# EAGLE board Qwiic_LoRa-Panel (EAGLE 7.7.0)
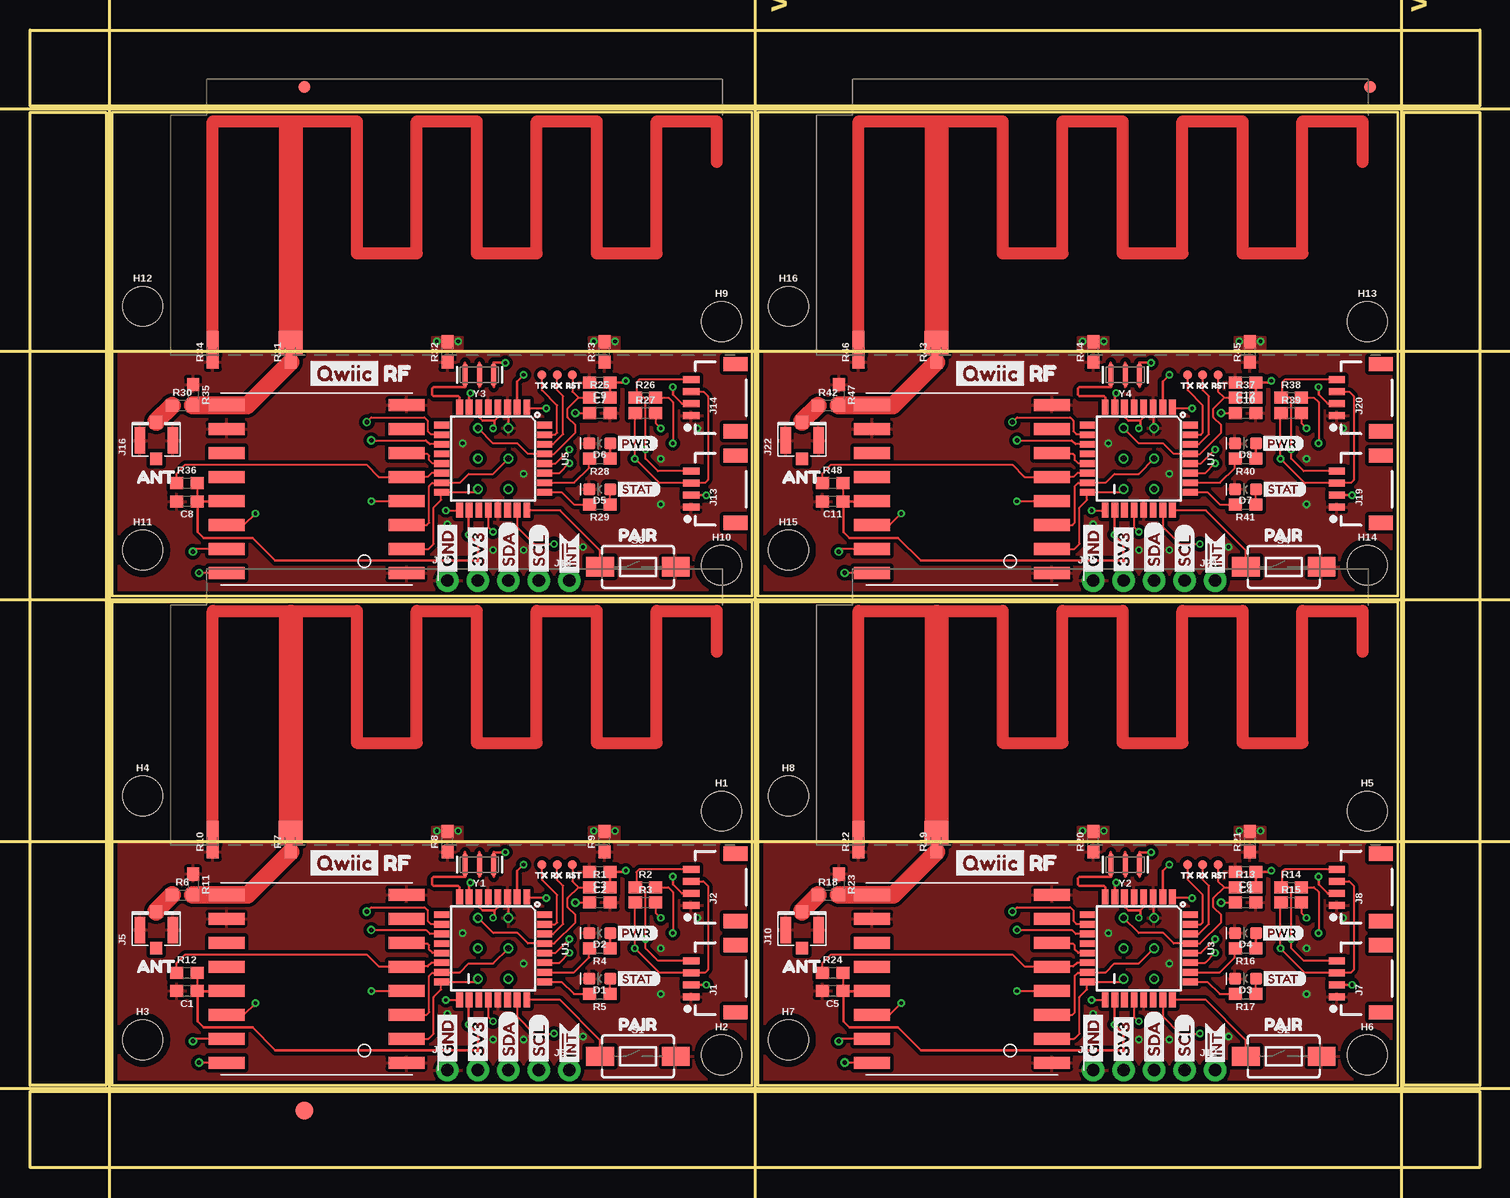
[diagram p0: board, top side]
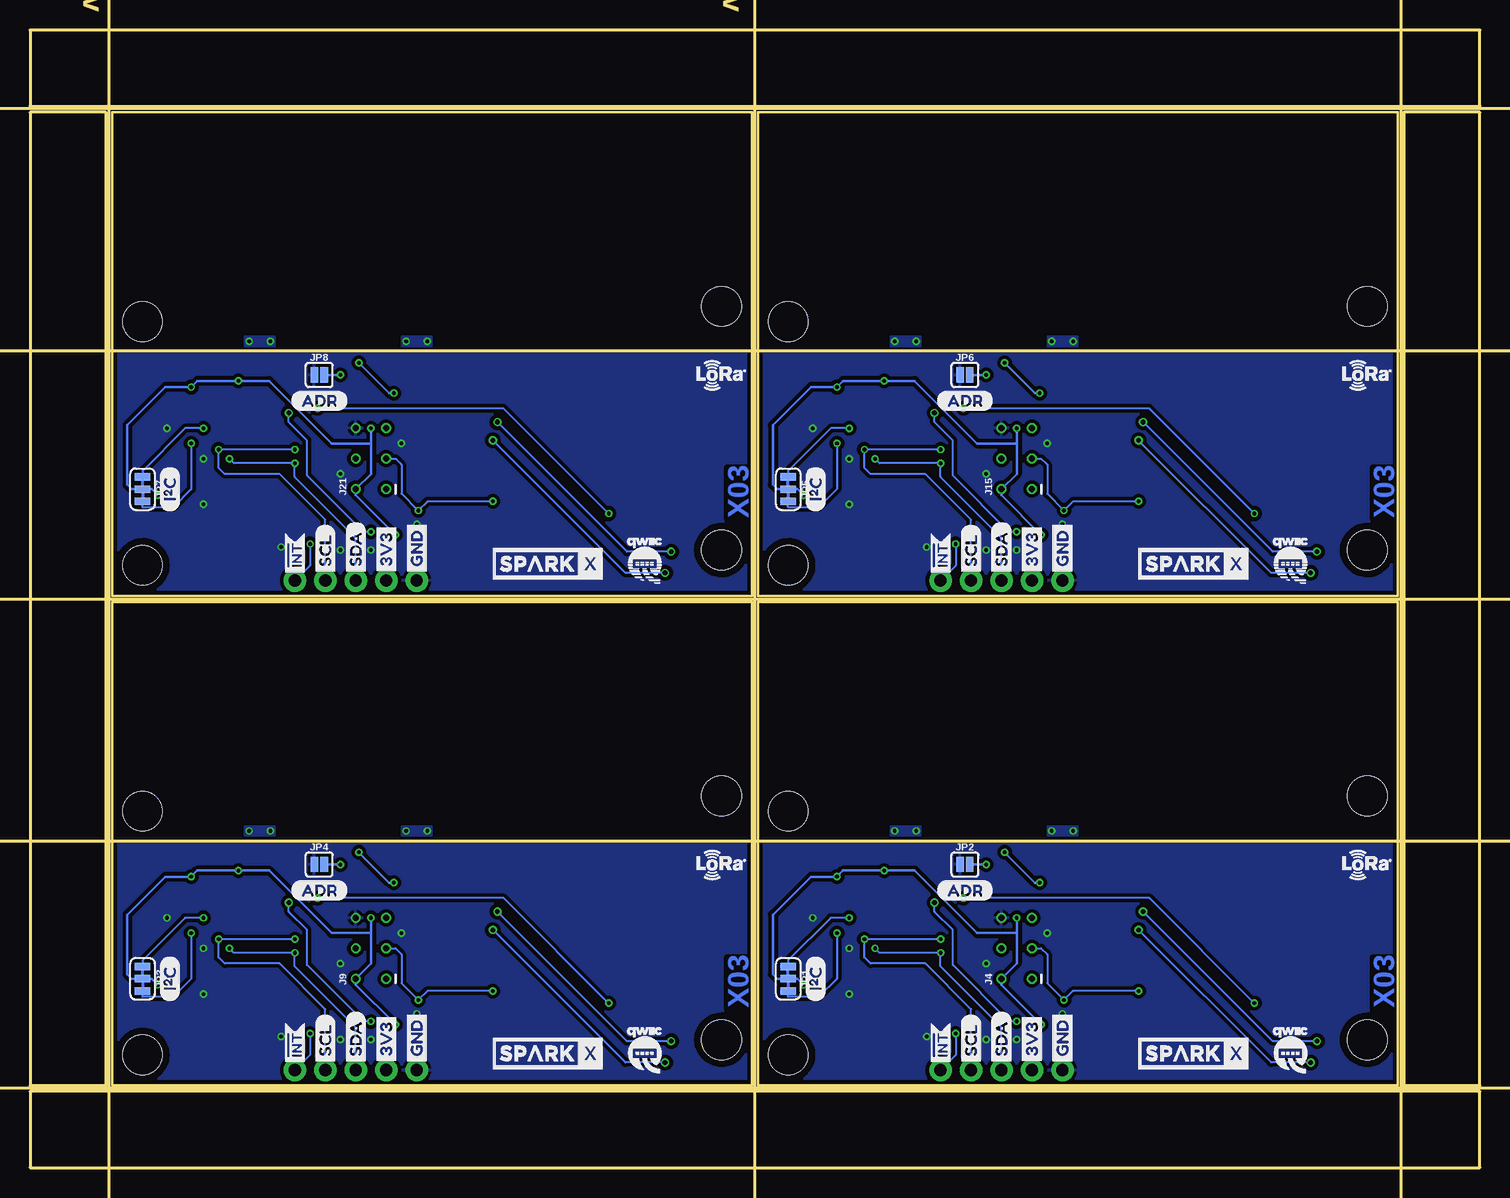
[diagram p1: board, bottom side, seen from below]

Size 120.86 x 94.84 mm. Coordinates in mm from the lower left corner, seen from the top.
Outline: 6.86,6.86 60.18,6.86 60.18,47.17 6.86,47.17 6.86,6.86
Outline: 60.69,6.86 114.01,6.86 114.01,47.17 60.69,47.17 60.69,6.86
Outline: 6.86,47.68 60.18,47.68 60.18,87.99 6.86,87.99 6.86,47.68
Outline: 60.69,47.68 114.01,47.68 114.01,87.99 60.69,87.99 60.69,47.68
Outline: 0,6.35 120.86,6.35 120.86,0 0,0 0,6.35
Outline: 114.51,87.99 120.86,87.99 120.86,6.86 114.51,6.86 114.51,87.99
Outline: 0,94.84 120.86,94.84 120.86,88.49 0,88.49 0,94.84
Outline: 0,87.99 6.35,87.99 6.35,6.86 0,6.86 0,87.99
Copper layers (1*16): Top 0.035mm / dielectric 1.5mm / Bottom 0.035mm
Design rules "SparkFun-2-layer-PCBWay-LIMIT": minimum track width 6mil, minimum drill 0.3mm, track to track 6mil, track to pad 6mil, pad to pad 6mil, via to via 6mil, smd to smd 6mil, copper to edge 6mil, drill to drill 6mil, minimum pad ring 6mil, minimum via ring 6mil, stop-mask expansion 4mil, vias tented up to drill 25mil, thermal gap 10mil
Net classes: 0 default: width 0.152 mm, drill 0.305 mm; 1 3v3: width 0.203 mm, drill 0.305 mm
Milling: 8 lines

## Footprints (pad centres in the part's own frame; a part is rotated, then mirrored left to right if it is on the bottom)
0603 = smd 1.1 x 1: 1 -0.85,0; 2 0.85,0
LED-0603 = smd 1 x 1: A -0.877,0; C 0.877,0
FIDUCIAL-1X2 = smd 1 x 1: 1 0,0
FIDUCIAL-1.5X3 = smd 1.5 x 1.5: 1 0,0
STAND-OFF = hole 3.302: 0,0
1X04_1MM_RA = smd 0.6 x 1.35: 1 -1.5,0; 2 -0.5,0; 3 0.5,0; 4 1.5,0 | smd 1.2 x 2: NC1 2.8,-3.675; NC2 -2.8,-3.675
1X04_NO_SILK = drill 1.016 pad 1.88: 1 0,0; 2 2.54,0; 3 5.08,0; 4 7.62,0
2X3_TEST_POINTS = drill 0.508: 1 -2.54,-1.27; 2 -2.54,1.27; 3 0,-1.27; 4 0,1.27; 5 2.54,-1.27; 6 2.54,1.27
U.FL = smd 2.2 x 0.85: 1 0,1.375; 2 0,-1.375 | smd 1.05 x 1: FEED 1.525,0; NC -1.525,0
1X01_NO_SILK = drill 1.016 pad 1.88: 1 0,0
SMT-JUMPER_3_2-NC_TRACE_SILK = smd 0.635 x 1.27: 1 -1.016,0; 2 0,0; 3 1.016,0
SMT-JUMPER_2_NO_SILK = smd 0.635 x 1.27: 1 -0.406,0; 2 0.406,0
TACTILE_SWITCH_SMD_6.0X3.5MM = smd 2.3 x 1.6: 1 -3.15,0; 2 3.15,0
PAD.03X.03 = smd 0.762 x 0.762: P$1 0,0
TQFP32-08 = smd 1.27 x 0.559: 1 -4.293,2.8; 2 -4.293,2; 3 -4.293,1.2; 4 -4.293,0.4; 5 -4.293,-0.4; 6 -4.293,-1.2; 7 -4.293,-2; 8 -4.293,-2.8; 17 4.293,-2.8; 18 4.293,-2; 19 4.293,-1.2; 20 4.293,-0.4; 21 4.293,0.4; 22 4.293,1.2; 23 4.293,2; 24 4.293,2.8 | smd 0.559 x 1.27: 9 -2.8,-4.293; 10 -2,-4.293; 11 -1.2,-4.293; 12 -0.4,-4.293; 13 0.4,-4.293; 14 1.2,-4.293; 15 2,-4.293; 16 2.8,-4.293; 25 2.8,4.293; 26 2,4.293; 27 1.2,4.293; 28 0.4,4.293; 29 -0.4,4.293; 30 -1.2,4.293; 31 -2,4.293; 32 -2.8,4.293
RFM95/96/97/98W = smd 3 x 1: 3.3V 7.5,1; !RESET -7.5,-3; ANT 7.5,-7; DIO0 7.5,3; DIO1 7.5,5; DIO2 7.5,7; DIO3 7.5,-3; DIO4 7.5,-1; DIO5 -7.5,-5; GND@1 -7.5,7; GND@2 -7.5,-7; GND@3 7.5,-5; MISO -7.5,5; MOSI -7.5,3; NSS -7.5,-1; SCK -7.5,1
ANTENNA_INVERTED_F_915MHZ = smd 2 x 2: FEED 6,2 | smd 1 x 2: GND -0.5,2
RESONATOR-SMD-3.2X1.3 = smd 0.45 x 1.905: 1 -1.2,0; 2 0,0; 3 1.2,0

## Placement (x,y rotation side)
C1  4.7uF  [0603]  13.08,14.73 180 top
C2  0.1uF  [0603]  47.5,22.1 0 top
C3  0.1uF  [0603]  47.5,24.64 180 top
C4  0.1uF  [0603]  101.33,22.1 0 top
C5  4.7uF  [0603]  66.91,14.73 180 top
C6  0.1uF  [0603]  101.33,24.64 180 top
C7  0.1uF  [0603]  47.5,62.92 0 top
C8  4.7uF  [0603]  13.08,55.55 180 top
C9  0.1uF  [0603]  47.5,65.46 180 top
C10  0.1uF  [0603]  101.33,62.92 0 top
C11  4.7uF  [0603]  66.91,55.55 180 top
C12  0.1uF  [0603]  101.33,65.46 180 top
D1  BLUE  [LED-0603]  47.5,15.75 180 top
D2  RED  [LED-0603]  47.5,19.56 180 top
D3  BLUE  [LED-0603]  101.33,15.75 180 top
D4  RED  [LED-0603]  101.33,19.56 180 top
D5  BLUE  [LED-0603]  47.5,56.57 180 top
D6  RED  [LED-0603]  47.5,60.38 180 top
D7  BLUE  [LED-0603]  101.33,56.57 180 top
D8  RED  [LED-0603]  101.33,60.38 180 top
E$1  [FIDUCIAL-1X2]  22.86,90.08 0 top
E$2  [FIDUCIAL-1X2]  111.72,90.08 0 top
E$3  [FIDUCIAL-1.5X3]  22.86,4.76 0 top
H1  STAND-OFF  [STAND-OFF]  57.66,29.72 0 top
H2  STAND-OFF  [STAND-OFF]  57.66,9.4 0 top
H3  STAND-OFF  [STAND-OFF]  9.4,10.67 0 top
H4  STAND-OFF  [STAND-OFF]  9.4,30.99 0 top
H5  STAND-OFF  [STAND-OFF]  111.49,29.72 0 top
H6  STAND-OFF  [STAND-OFF]  111.49,9.4 0 top
H7  STAND-OFF  [STAND-OFF]  63.23,10.67 0 top
H8  STAND-OFF  [STAND-OFF]  63.23,30.99 0 top
H9  STAND-OFF  [STAND-OFF]  57.66,70.54 0 top
H10  STAND-OFF  [STAND-OFF]  57.66,50.22 0 top
H11  STAND-OFF  [STAND-OFF]  9.4,51.49 0 top
H12  STAND-OFF  [STAND-OFF]  9.4,71.81 0 top
H13  STAND-OFF  [STAND-OFF]  111.49,70.54 0 top
H14  STAND-OFF  [STAND-OFF]  111.49,50.22 0 top
H15  STAND-OFF  [STAND-OFF]  63.23,51.49 0 top
H16  STAND-OFF  [STAND-OFF]  63.23,71.81 0 top
J1  Qwiic Right Angle  [1X04_1MM_RA]  55.12,15.75 90 top
J2  Qwiic Right Angle  [1X04_1MM_RA]  55.12,23.37 90 top
J3  [1X04_NO_SILK]  34.8,8.13 0 top
J4  AVR_SPI_PROG  [2X3_TEST_POINTS]  38.61,18.29 90 bottom
J5  U.FL  [U.FL]  10.54,19.81 90 top
J6  [1X01_NO_SILK]  44.96,8.13 0 top
J7  Qwiic Right Angle  [1X04_1MM_RA]  108.95,15.75 90 top
J8  Qwiic Right Angle  [1X04_1MM_RA]  108.95,23.37 90 top
J9  AVR_SPI_PROG  [2X3_TEST_POINTS]  92.44,18.29 90 bottom
J10  U.FL  [U.FL]  64.37,19.81 90 top
J11  [1X04_NO_SILK]  88.63,8.13 0 top
J12  [1X01_NO_SILK]  98.79,8.13 0 top
J13  Qwiic Right Angle  [1X04_1MM_RA]  55.12,56.57 90 top
J14  Qwiic Right Angle  [1X04_1MM_RA]  55.12,64.19 90 top
J15  AVR_SPI_PROG  [2X3_TEST_POINTS]  38.61,59.11 90 bottom
J16  U.FL  [U.FL]  10.54,60.63 90 top
J17  [1X04_NO_SILK]  34.8,48.95 0 top
J18  [1X01_NO_SILK]  44.96,48.95 0 top
J19  Qwiic Right Angle  [1X04_1MM_RA]  108.95,56.57 90 top
J20  Qwiic Right Angle  [1X04_1MM_RA]  108.95,64.19 90 top
J21  AVR_SPI_PROG  [2X3_TEST_POINTS]  92.44,59.11 90 bottom
J22  U.FL  [U.FL]  64.37,60.63 90 top
J23  [1X04_NO_SILK]  88.63,48.95 0 top
J24  [1X01_NO_SILK]  98.79,48.95 0 top
JP1  [SMT-JUMPER_3_2-NC_TRACE_SILK]  57.66,15.75 270 bottom
JP2  JUMPER-SMT_2_NO_SILK  [SMT-JUMPER_2_NO_SILK]  42.93,25.27 0 bottom
JP3  [SMT-JUMPER_3_2-NC_TRACE_SILK]  111.49,15.75 270 bottom
JP4  JUMPER-SMT_2_NO_SILK  [SMT-JUMPER_2_NO_SILK]  96.75,25.27 0 bottom
JP5  [SMT-JUMPER_3_2-NC_TRACE_SILK]  57.66,56.57 270 bottom
JP6  JUMPER-SMT_2_NO_SILK  [SMT-JUMPER_2_NO_SILK]  42.93,66.09 0 bottom
JP7  [SMT-JUMPER_3_2-NC_TRACE_SILK]  111.49,56.57 270 bottom
JP8  JUMPER-SMT_2_NO_SILK  [SMT-JUMPER_2_NO_SILK]  96.75,66.09 0 bottom
R1  10k  [0603]  47.5,23.37 0 top
R2  2.2k  [0603]  51.31,23.37 0 top
R3  2.2k  [0603]  51.31,22.1 0 top
R4  1k  [0603]  47.5,18.29 180 top
R5  1k  [0603]  47.5,14.48 180 top
R6  DNP  [0603]  12.7,22.73 0 top
R7  0  [0603]  21.72,27.18 90 top
R8  0  [0603]  34.8,27.18 90 top
R9  0  [0603]  47.88,27.18 90 top
R10  0  [0603]  15.24,27.18 90 top
R11  DNP  [0603]  13.59,23.62 270 top
R12  10k  [0603]  13.08,16.26 0 top
R13  10k  [0603]  101.33,23.37 0 top
R14  2.2k  [0603]  105.14,23.37 0 top
R15  2.2k  [0603]  105.14,22.1 0 top
R16  1k  [0603]  101.33,18.29 180 top
R17  1k  [0603]  101.33,14.48 180 top
R18  DNP  [0603]  66.53,22.73 0 top
R19  0  [0603]  75.55,27.18 90 top
R20  0  [0603]  88.63,27.18 90 top
R21  0  [0603]  101.71,27.18 90 top
R22  0  [0603]  69.07,27.18 90 top
R23  DNP  [0603]  67.42,23.62 270 top
R24  10k  [0603]  66.91,16.26 0 top
R25  10k  [0603]  47.5,64.19 0 top
R26  2.2k  [0603]  51.31,64.19 0 top
R27  2.2k  [0603]  51.31,62.92 0 top
R28  1k  [0603]  47.5,59.11 180 top
R29  1k  [0603]  47.5,55.3 180 top
R30  DNP  [0603]  12.7,63.55 0 top
R31  0  [0603]  21.72,68 90 top
R32  0  [0603]  34.8,68 90 top
R33  0  [0603]  47.88,68 90 top
R34  0  [0603]  15.24,68 90 top
R35  DNP  [0603]  13.59,64.44 270 top
R36  10k  [0603]  13.08,57.07 0 top
R37  10k  [0603]  101.33,64.19 0 top
R38  2.2k  [0603]  105.14,64.19 0 top
R39  2.2k  [0603]  105.14,62.92 0 top
R40  1k  [0603]  101.33,59.11 180 top
R41  1k  [0603]  101.33,55.3 180 top
R42  DNP  [0603]  66.53,63.55 0 top
R43  0  [0603]  75.55,68 90 top
R44  0  [0603]  88.63,68 90 top
R45  0  [0603]  101.71,68 90 top
R46  0  [0603]  69.07,68 90 top
R47  DNP  [0603]  67.42,64.44 270 top
R48  10k  [0603]  66.91,57.07 0 top
S1  6.0X3.5MM  [TACTILE_SWITCH_SMD_6.0X3.5MM]  50.67,9.27 0 top
S2  6.0X3.5MM  [TACTILE_SWITCH_SMD_6.0X3.5MM]  104.5,9.27 0 top
S3  6.0X3.5MM  [TACTILE_SWITCH_SMD_6.0X3.5MM]  50.67,50.09 0 top
S4  6.0X3.5MM  [TACTILE_SWITCH_SMD_6.0X3.5MM]  104.5,50.09 0 top
TP1  [PAD.03X.03]  43.94,25.27 0 top
TP2  [PAD.03X.03]  42.67,25.27 0 top
TP3  [PAD.03X.03]  45.21,25.27 0 top
TP4  [PAD.03X.03]  97.77,25.27 0 top
TP5  [PAD.03X.03]  96.5,25.27 0 top
TP6  [PAD.03X.03]  99.04,25.27 0 top
TP7  [PAD.03X.03]  43.94,66.09 0 top
TP8  [PAD.03X.03]  42.67,66.09 0 top
TP9  [PAD.03X.03]  45.21,66.09 0 top
TP10  [PAD.03X.03]  97.77,66.09 0 top
TP11  [PAD.03X.03]  96.5,66.09 0 top
TP12  [PAD.03X.03]  99.04,66.09 0 top
U1  ATMEGA328P_TQFP  [TQFP32-08]  38.61,18.29 270 top
U2  RFM96W  [RFM95/96/97/98W]  23.88,15.75 180 top
U3  ATMEGA328P_TQFP  [TQFP32-08]  92.44,18.29 270 top
U4  RFM96W  [RFM95/96/97/98W]  77.7,15.75 180 top
U5  ATMEGA328P_TQFP  [TQFP32-08]  38.61,59.11 270 top
U6  RFM96W  [RFM95/96/97/98W]  23.88,56.57 180 top
U7  ATMEGA328P_TQFP  [TQFP32-08]  92.44,59.11 270 top
U8  RFM96W  [RFM95/96/97/98W]  77.7,56.57 180 top
U$1  ANTENNA_915MHZ_INVERTED_F  [ANTENNA_INVERTED_F_915MHZ]  15.75,25.91 0 top
U$2  [ANT0]  8,16.76 0 top
U$3  [PAIR1]  48.13,11.94 0 top
U$4  [SDA-[)]  39.88,8.38 90 top
U$5  [SCL-[)]  42.42,8.38 90 top
U$6  [GND-04]  34.8,8.38 90 top
U$7  [3V3-04]  37.34,8.38 90 top
U$8  [PWR1]  48.64,19.56 0 top
U$9  [STAT2]  48.64,15.75 0 top
U$10  [QWIIC-LOGO-SMALL]  15.88,9.78 0 bottom
U$11  [TX1]  41.66,24.38 0 top
U$12  [INT#-[<]  44.96,8.13 90 top
U$13  [SPARKX-MEDIUM]  23.88,9.53 0 bottom
U$14  [ADR-()]  45.34,23.11 0 bottom
U$15  [RF1]  28.32,25.4 0 top
U$16  [QWIIC0]  22.73,25.4 0 top
U$17  [LORA_MARK#PNG]  9.53,25.27 0 bottom
U$18  [GND-04]  34.8,8.38 90 top
U$19  [GND-04]  34.8,8.38 90 bottom
U$20  [3V3-04]  37.34,8.38 90 top
U$21  [3V3-04]  37.34,8.38 90 bottom
U$22  [SDA-[)]  39.88,8.38 90 bottom
U$23  [SCL-[)]  42.42,8.38 90 bottom
U$24  [INT#-[<]  44.96,8.13 90 bottom
U$25  [I_SUPER2_C-()-04]  55.37,13.84 90 bottom
U$26  ANTENNA_915MHZ_INVERTED_F  [ANTENNA_INVERTED_F_915MHZ]  69.58,25.91 0 top
U$27  [RX0]  42.93,24.38 0 top
U$28  [RST2]  44.2,24.38 0 top
U$29  [SDA-[)]  93.71,8.38 90 top
U$30  [SCL-[)]  96.25,8.38 90 top
U$31  [GND-04]  88.63,8.38 90 top
U$32  [3V3-04]  91.17,8.38 90 top
U$33  [PWR1]  102.47,19.56 0 top
U$34  [STAT2]  102.47,15.75 0 top
U$35  [QWIIC0]  76.56,25.4 0 top
U$36  [SPARKX-MEDIUM]  77.7,9.53 0 bottom
U$37  [INT#-[<]  98.79,8.13 90 top
U$38  [GND-04]  88.63,8.38 90 top
U$39  [GND-04]  88.63,8.38 90 bottom
U$40  [3V3-04]  91.17,8.38 90 top
U$41  [3V3-04]  91.17,8.38 90 bottom
U$42  [SDA-[)]  93.71,8.38 90 bottom
U$43  [SCL-[)]  96.25,8.38 90 bottom
U$44  [INT#-[<]  98.79,8.13 90 bottom
U$45  [ADR-()]  99.17,23.11 0 bottom
U$46  [I_SUPER2_C-()-04]  109.2,13.84 90 bottom
U$47  [RF1]  82.15,25.4 0 top
U$48  [QWIIC-LOGO-SMALL]  69.7,9.78 0 bottom
U$49  [LORA_MARK#PNG]  63.35,25.27 0 bottom
U$50  [ANT0]  61.83,16.76 0 top
U$51  [PAIR1]  101.96,11.94 0 top
U$52  [TX1]  95.48,24.38 0 top
U$53  [RX0]  96.75,24.38 0 top
U$54  [RST2]  98.02,24.38 0 top
U$55  ANTENNA_915MHZ_INVERTED_F  [ANTENNA_INVERTED_F_915MHZ]  15.75,66.73 0 top
U$56  [SDA-[)]  39.88,49.2 90 top
U$57  [SCL-[)]  42.42,49.2 90 top
U$58  [GND-04]  34.8,49.2 90 top
U$59  [3V3-04]  37.34,49.2 90 top
U$60  [PWR1]  48.64,60.38 0 top
U$61  [STAT2]  48.64,56.57 0 top
U$62  [QWIIC0]  22.73,66.22 0 top
U$63  [SPARKX-MEDIUM]  23.88,50.34 0 bottom
U$64  [INT#-[<]  44.96,48.95 90 top
U$65  [GND-04]  34.8,49.2 90 top
U$66  [GND-04]  34.8,49.2 90 bottom
U$67  [3V3-04]  37.34,49.2 90 top
U$68  [3V3-04]  37.34,49.2 90 bottom
U$69  [SDA-[)]  39.88,49.2 90 bottom
U$70  [SCL-[)]  42.42,49.2 90 bottom
U$71  [INT#-[<]  44.96,48.95 90 bottom
U$72  [ADR-()]  45.34,63.93 0 bottom
U$73  [I_SUPER2_C-()-04]  55.37,54.66 90 bottom
U$74  [RF1]  28.32,66.22 0 top
U$75  [QWIIC-LOGO-SMALL]  15.88,50.6 0 bottom
U$76  [LORA_MARK#PNG]  9.53,66.09 0 bottom
U$77  [ANT0]  8,57.58 0 top
U$78  [PAIR1]  48.13,52.76 0 top
U$79  [TX1]  41.66,65.2 0 top
U$80  [RX0]  42.93,65.2 0 top
U$81  [RST2]  44.2,65.2 0 top
U$82  ANTENNA_915MHZ_INVERTED_F  [ANTENNA_INVERTED_F_915MHZ]  69.58,66.73 0 top
U$83  [SDA-[)]  93.71,49.2 90 top
U$84  [SCL-[)]  96.25,49.2 90 top
U$85  [GND-04]  88.63,49.2 90 top
U$86  [3V3-04]  91.17,49.2 90 top
U$87  [PWR1]  102.47,60.38 0 top
U$88  [STAT2]  102.47,56.57 0 top
U$89  [QWIIC0]  76.56,66.22 0 top
U$90  [SPARKX-MEDIUM]  77.7,50.34 0 bottom
U$91  [INT#-[<]  98.79,48.95 90 top
U$92  [GND-04]  88.63,49.2 90 top
U$93  [GND-04]  88.63,49.2 90 bottom
U$94  [3V3-04]  91.17,49.2 90 top
U$95  [3V3-04]  91.17,49.2 90 bottom
U$96  [SDA-[)]  93.71,49.2 90 bottom
U$97  [SCL-[)]  96.25,49.2 90 bottom
U$98  [INT#-[<]  98.79,48.95 90 bottom
U$99  [ADR-()]  99.17,63.93 0 bottom
U$100  [I_SUPER2_C-()-04]  109.2,54.66 90 bottom
U$101  [RF1]  82.15,66.22 0 top
U$102  [QWIIC-LOGO-SMALL]  69.7,50.6 0 bottom
U$103  [LORA_MARK#PNG]  63.35,66.09 0 bottom
U$104  [ANT0]  61.83,57.58 0 top
U$105  [PAIR1]  101.96,52.76 0 top
U$106  [TX1]  95.48,65.2 0 top
U$107  [RX0]  96.75,65.2 0 top
U$108  [RST2]  98.02,65.2 0 top
Y1  16MHz  [RESONATOR-SMD-3.2X1.3]  37.47,25.27 180 top
Y2  16MHz  [RESONATOR-SMD-3.2X1.3]  91.29,25.27 180 top
Y3  16MHz  [RESONATOR-SMD-3.2X1.3]  37.47,66.09 180 top
Y4  16MHz  [RESONATOR-SMD-3.2X1.3]  91.29,66.09 180 top

## Library data of the parts
C1 C5 C8 C11 = SparkFun-Capacitors; PROD_ID: CAP-08280
C2-C4 C6 C7 C9 C10 C12 = SparkFun-Capacitors; PROD_ID: CAP-00810
D1 D3 D5 D7 = SparkFun-LED; PROD_ID: DIO-08575
D2 D4 D6 D8 = SparkFun-LED; PROD_ID: DIO-00819
E$1 E$2 = SparkFun-Aesthetics
E$3 = SparkFun-Retired
H1-H16 = SparkFun-Hardware
J1 J2 J7 J8 J13 J14 J19 J20 = SparkFun-Connectors; PROD_ID: CONN-13694
J3 J11 J17 J23 = SparkFun-Connectors; PROD_ID: CONN-09696
J4 J6 J9 J12 J15 J18 J21 J24 TP1-TP12 = SparkFun-Connectors
J5 J10 J16 J22 = SparkFun-Connectors; PROD_ID: CONN-09193; SF_ID: WRL-09144
JP1-JP8 = SparkFun-Jumpers
R1 R12 R13 R24 R25 R36 R37 R48 = SparkFun-Resistors; PROD_ID: RES-00824
R2 R3 R14 R15 R26 R27 R38 R39 = SparkFun-Resistors; PROD_ID: RES-08272
R4 R5 R16 R17 R28 R29 R40 R41 = SparkFun-Resistors; PROD_ID: RES-07856
R6-R11 R18-R23 R30-R35 R42-R47 = SparkFun-Resistors
S1-S4 = SparkFun-Switches; PROD_ID: SWCH-00815; SF_SKU: COM-08229
U1 U3 U5 U7 = SparkFun-IC-Microcontroller; PROD_ID: IC-09069
U2 U4 U6 U8 U$1 U$13 U$26 U$36 U$55 U$63 U$82 U$90 = SparkX
U$2 U$3 U$50 U$51 U$77 U$78 U$104 U$105 = buzzard_labels (30)
U$4-U$7 U$10 U$12 U$14 U$18-U$25 U$29-U$32 U$37-U$46 U$48 U$56-U$59 U$64-U$73 U$75 U$83-U$86 U$91-U$100 U$102 = Labels
U$8 U$9 U$33 U$34 U$60 U$61 U$87 U$88 = buzzard_labels
U$11 U$27 U$28 U$52-U$54 U$79-U$81 U$106-U$108 = buzzard_labels (32)
U$15 U$47 U$74 U$101 = buzzard_labels (29)
U$16 U$35 U$62 U$89 = buzzard_labels (1)
U$17 U$49 U$76 U$103 = lora_mark#PNG (3)
Y1-Y4 = SparkFun-Clocks; PROD_ID: XTAL-08900

## Nets
3.3V [3v3]: C1.1 C3.1 J1.2 J2.2 J3.2 J4.2 JP1.2 R1.2 R12.2 U1.4 U1.6 U1.18 U2.3.3V
3.3V1 [3v3]: C5.1 C6.1 J7.2 J8.2 J9.2 J11.2 JP3.2 R13.2 R24.2 U3.4 U3.6 U3.18 U4.3.3V
3.3V2 [3v3]: C8.1 C9.1 J13.2 J14.2 J15.2 J17.2 JP5.2 R25.2 R36.2 U5.4 U5.6 U5.18 U6.3.3V
3.3V3 [3v3]: C11.1 C12.1 J19.2 J20.2 J21.2 J23.2 JP7.2 R37.2 R48.2 U7.4 U7.6 U7.18 U8.3.3V
ADDR_SELECT: JP2.2 U1.2
ADDR_SELECT1: JP4.2 U3.2
ADDR_SELECT2: JP6.2 U5.2
ADDR_SELECT3: JP8.2 U7.2
ANCHOR1: R8.2
ANCHOR2: R9.2
ANCHOR3: R20.2
ANCHOR4: R21.2
ANCHOR5: R32.2
ANCHOR6: R33.2
ANCHOR7: R44.2
ANCHOR8: R45.2
ANT: R6.2 R7.1 R11.2 U2.ANT
ANT1: R18.2 R19.1 R23.2 U4.ANT
ANT2: R30.2 R31.1 R35.2 U6.ANT
ANT3: R42.2 R43.1 R47.2 U8.ANT
GND: C1.2 C2.2 C3.2 D1.C D2.C J1.1 J2.1 J3.1 J4.6 J5.1 J5.2 JP2.1 R8.1 R9.1 R10.1 R11.1 S1.2 U1.3 U1.5 U1.21 U2.GND@1 U2.GND@2 U2.GND@3 Y1.2
GND1: C4.2 C5.2 C6.2 D3.C D4.C J7.1 J8.1 J9.6 J10.1 J10.2 J11.1 JP4.1 R20.1 R21.1 R22.1 R23.1 S2.2 U3.3 U3.5 U3.21 U4.GND@1 U4.GND@2 U4.GND@3 Y2.2
GND2: C7.2 C8.2 C9.2 D5.C D6.C J13.1 J14.1 J15.6 J16.1 J16.2 J17.1 JP6.1 R32.1 R33.1 R34.1 R35.1 S3.2 U5.3 U5.5 U5.21 U6.GND@1 U6.GND@2 U6.GND@3 Y3.2
GND3: C10.2 C11.2 C12.2 D7.C D8.C J19.1 J20.1 J21.6 J22.1 J22.2 J23.1 JP8.1 R44.1 R45.1 R46.1 R47.1 S4.2 U7.3 U7.5 U7.21 U8.GND@1 U8.GND@2 U8.GND@3 Y4.2
INT: J6.1 U1.23
INT1: J12.1 U3.23
INT2: J18.1 U5.23
INT3: J24.1 U7.23
MISO: J4.1 U1.16 U2.MISO
MISO1: J9.1 U3.16 U4.MISO
MISO2: J15.1 U5.16 U6.MISO
MISO3: J21.1 U7.16 U8.MISO
MOSI: J4.4 U1.15 U2.MOSI
MOSI1: J9.4 U3.15 U4.MOSI
MOSI2: J15.4 U5.15 U6.MOSI
MOSI3: J21.4 U7.15 U8.MOSI
N$1: D2.A R4.1
N$2: D1.A R5.1
N$3: C2.1 U1.20
N$4: U1.7 Y1.1
N$5: U1.8 Y1.3
N$6: R7.2 U$1.FEED
N$7: JP1.1 R3.2
N$8: JP1.3 R2.2
N$9: J5.FEED R6.1
N$10: U3.7 Y2.1
N$11: R10.2 U$1.GND
N$12: U3.8 Y2.3
N$13: JP3.1 R15.2
N$14: JP3.3 R14.2
N$15: D4.A R16.1
N$16: D3.A R17.1
N$17: J10.FEED R18.1
N$18: C4.1 U3.20
N$19: R19.2 U$26.FEED
N$20: R22.2 U$26.GND
N$21: U5.7 Y3.1
N$22: U5.8 Y3.3
N$23: JP5.1 R27.2
N$24: JP5.3 R26.2
N$25: D6.A R28.1
N$26: D5.A R29.1
N$27: J16.FEED R30.1
N$28: C7.1 U5.20
N$29: R31.2 U$55.FEED
N$30: R34.2 U$55.GND
N$31: U7.7 Y4.1
N$32: U7.8 Y4.3
N$33: JP7.1 R39.2
N$34: JP7.3 R38.2
N$35: D8.A R40.1
N$36: D7.A R41.1
N$37: J22.FEED R42.1
N$38: C10.1 U7.20
N$39: R43.2 U$82.FEED
N$40: R46.2 U$82.GND
PAIR_BTN: S1.1 U1.24
PAIR_BTN1: S2.1 U3.24
PAIR_BTN2: S3.1 U5.24
PAIR_BTN3: S4.1 U7.24
PAIR_LED: R5.2 U1.25
PAIR_LED1: R17.2 U3.25
PAIR_LED2: R29.2 U5.25
PAIR_LED3: R41.2 U7.25
PWR_LED: R4.2 U1.26
PWR_LED1: R16.2 U3.26
PWR_LED2: R28.2 U5.26
PWR_LED3: R40.2 U7.26
RFM_CS: R12.1 U1.14 U2.NSS
RFM_CS1: R24.1 U3.14 U4.NSS
RFM_CS2: R36.1 U5.14 U6.NSS
RFM_CS3: R48.1 U7.14 U8.NSS
RFM_DIO1: U1.10 U2.DIO1
RFM_DIO2: U1.11 U2.DIO2
RFM_DIO3: U3.10 U4.DIO1
RFM_DIO4: U3.11 U4.DIO2
RFM_DIO5: U5.10 U6.DIO1
RFM_DIO6: U5.11 U6.DIO2
RFM_DIO7: U7.10 U8.DIO1
RFM_DIO8: U7.11 U8.DIO2
RFM_INT: U1.1 U2.DIO0
RFM_INT1: U3.1 U4.DIO0
RFM_INT2: U5.1 U6.DIO0
RFM_INT3: U7.1 U8.DIO0
RFM_RST: U1.13 U2.!RESET
RFM_RST1: U3.13 U4.!RESET
RFM_RST2: U5.13 U6.!RESET
RFM_RST3: U7.13 U8.!RESET
RST: J4.5 R1.1 TP3.P$1 U1.29
RST1: J9.5 R13.1 TP6.P$1 U3.29
RST2: J15.5 R25.1 TP9.P$1 U5.29
RST3: J21.5 R37.1 TP12.P$1 U7.29
RX: TP1.P$1 U1.30
RX1: TP4.P$1 U3.30
RX2: TP7.P$1 U5.30
RX3: TP10.P$1 U7.30
SCK: J4.3 U1.17 U2.SCK
SCK1: J9.3 U3.17 U4.SCK
SCK2: J15.3 U5.17 U6.SCK
SCK3: J21.3 U7.17 U8.SCK
SCL: J1.4 J2.4 J3.4 R2.1 U1.28
SCL1: J7.4 J8.4 J11.4 R14.1 U3.28
SCL2: J13.4 J14.4 J17.4 R26.1 U5.28
SCL3: J19.4 J20.4 J23.4 R38.1 U7.28
SDA: J1.3 J2.3 J3.3 R3.1 U1.27
SDA1: J7.3 J8.3 J11.3 R15.1 U3.27
SDA2: J13.3 J14.3 J17.3 R27.1 U5.27
SDA3: J19.3 J20.3 J23.3 R39.1 U7.27
TX: TP2.P$1 U1.31
TX1: TP5.P$1 U3.31
TX2: TP8.P$1 U5.31
TX3: TP11.P$1 U7.31

## Tracks (layer width: path | path; a pad name or v marks a point on that pad's centre or on a via)
3.3V  (via drill 0.3)
  Top 0.152: R12.2 C1.1
  Top 0.203: J3.2 37.34,9.78 | 37.34,9.78 37.34,11.18 v36.58,11.94 36.58,13.96 U1.18 | 37.34,9.78 20.45,9.78 18.54,11.68 14.48,11.68 13.97,12.19 13.97,14.69 | J1.2 v56.38,15.25 v56.39,15.24 | J2.2 54.35,22.87 53.59,23.62 v53.59,24.26 | U1.4 39.01,21.74 38.73,21.46 | 38.73,21.46 37.72,21.46 37.47,21.72 37.47,22.52 U1.6 | 38.73,21.46 38.73,20.95 v38.61,20.83 | 48.39,23.41 R1.2 C3.1 49.53,24.64 v49.66,24.76 | 13.97,14.69 C1.1 | 13.97,14.69 16.32,14.69 U2.3.3V
  Bottom 0.203: v56.39,15.24 56.9,15.75 JP1.2 58.55,15.75 58.93,16.13 58.93,21.08 55.75,24.26 v53.59,24.26 53.09,24.76 v49.66,24.76 47.12,24.76 41.91,19.56 38.61,19.56 | v36.58,11.94 39.88,15.24 J4.2 38.61,17.02 38.61,19.56 | v38.61,20.83 38.61,19.56
3.3V1  (via drill 0.3)
  Top 0.152: R24.2 C5.1
  Top 0.203: J11.2 91.17,9.78 | 91.17,9.78 91.17,11.18 v90.4,11.94 90.4,13.96 U3.18 | 91.17,9.78 74.28,9.78 72.37,11.68 68.31,11.68 67.8,12.19 67.8,14.69 | J7.2 110.21,15.25 v110.22,15.24 | J8.2 108.18,22.87 107.42,23.62 v107.42,24.26 | U3.4 92.84,21.74 92.56,21.46 | 92.56,21.46 91.55,21.46 91.29,21.72 91.29,22.52 U3.6 | 92.56,21.46 92.56,20.95 v92.44,20.83 | 102.22,23.41 R13.2 C6.1 103.36,24.64 v103.49,24.76 | 67.8,14.69 C5.1 | 67.8,14.69 70.15,14.69 U4.3.3V
  Bottom 0.203: v110.22,15.24 110.72,15.75 JP3.2 112.38,15.75 112.76,16.13 112.76,21.08 109.58,24.26 v107.42,24.26 106.91,24.76 v103.49,24.76 100.94,24.76 95.74,19.56 92.44,19.56 | v90.4,11.94 93.71,15.24 J9.2 92.44,17.02 92.44,19.56 | v92.44,20.83 92.44,19.56
3.3V2  (via drill 0.3)
  Top 0.152: R36.2 C8.1
  Top 0.203: J17.2 37.34,50.6 | 37.34,50.6 37.34,51.99 v36.58,52.76 36.58,54.78 U5.18 | 37.34,50.6 20.45,50.6 18.54,52.5 14.48,52.5 13.97,53.01 13.97,55.51 | J13.2 56.38,56.07 v56.39,56.06 | J14.2 54.35,63.69 53.59,64.44 v53.59,65.08 | U5.4 39.01,62.55 38.73,62.28 | 38.73,62.28 37.72,62.28 37.47,62.53 37.47,63.34 U5.6 | 38.73,62.28 38.73,61.77 v38.61,61.65 | 48.39,64.22 R25.2 C9.1 49.53,65.46 v49.66,65.58 | 13.97,55.51 C8.1 | 13.97,55.51 16.32,55.51 U6.3.3V
  Bottom 0.203: v56.39,56.06 56.9,56.57 JP5.2 58.55,56.57 58.93,56.95 58.93,61.9 55.75,65.08 v53.59,65.08 53.09,65.58 v49.66,65.58 47.12,65.58 41.91,60.38 38.61,60.38 | v36.58,52.76 39.88,56.06 J15.2 38.61,57.84 38.61,60.38 | v38.61,61.65 38.61,60.38
3.3V3  (via drill 0.3)
  Top 0.152: R48.2 C11.1
  Top 0.203: J23.2 91.17,50.6 | 91.17,50.6 91.17,51.99 v90.4,52.76 90.4,54.78 U7.18 | 91.17,50.6 74.28,50.6 72.37,52.5 68.31,52.5 67.8,53.01 67.8,55.51 | J19.2 110.21,56.07 v110.22,56.06 | J20.2 108.18,63.69 107.42,64.44 v107.42,65.08 | U7.4 92.84,62.55 92.56,62.28 | 92.56,62.28 91.55,62.28 91.29,62.53 91.29,63.34 U7.6 | 92.56,62.28 92.56,61.77 v92.44,61.65 | 102.22,64.22 R37.2 C12.1 103.36,65.46 v103.49,65.58 | 67.8,55.51 C11.1 | 67.8,55.51 70.15,55.51 U8.3.3V
  Bottom 0.203: v110.22,56.06 110.72,56.57 JP7.2 112.38,56.57 112.76,56.95 112.76,61.9 109.58,65.08 v107.42,65.08 106.91,65.58 v103.49,65.58 100.94,65.58 95.74,60.38 92.44,60.38 | v90.4,52.76 93.71,56.06 J21.2 92.44,57.84 92.44,60.38 | v92.44,61.65 92.44,60.38
ADDR_SELECT  (via drill 0.3)
  Top 0.203: U1.2 40.61,24.73 v41.15,25.27
  Bottom 0.203: v41.15,25.27 JP2.2
ADDR_SELECT1  (via drill 0.3)
  Top 0.203: U3.2 94.44,24.73 v94.98,25.27
  Bottom 0.203: v94.98,25.27 JP4.2
ADDR_SELECT2  (via drill 0.3)
  Top 0.203: U5.2 40.61,65.55 v41.15,66.09
  Bottom 0.203: v41.15,66.09 JP6.2
ADDR_SELECT3  (via drill 0.3)
  Top 0.203: U7.2 94.44,65.55 v94.98,66.09
  Bottom 0.203: v94.98,66.09 JP8.2
ANCHOR1  (via drill 0.3)
  other vias: 33.91,28.07 35.69,28.07
  pour Top (isolate 0.305, no thermals): 33.53,28.45 36.07,28.45 36.07,27.18 33.53,27.18
  pour Bottom (isolate 0.305, no thermals): 33.53,28.45 36.07,28.45 36.07,27.69 33.53,27.69
ANCHOR2  (via drill 0.3)
  other vias: 46.99,28.07 48.77,28.07
  pour Bottom (isolate 0.305, no thermals): 46.61,28.45 49.15,28.45 49.15,27.69 46.61,27.69
  pour Top (isolate 0.305, no thermals): 46.61,28.45 49.15,28.45 49.15,27.18 46.61,27.18
ANCHOR3  (via drill 0.3)
  other vias: 87.74,28.07 89.52,28.07
  pour Top (isolate 0.305, no thermals): 87.36,28.45 89.9,28.45 89.9,27.18 87.36,27.18
  pour Bottom (isolate 0.305, no thermals): 87.36,28.45 89.9,28.45 89.9,27.69 87.36,27.69
ANCHOR4  (via drill 0.3)
  other vias: 100.82,28.07 102.6,28.07
  pour Bottom (isolate 0.305, no thermals): 100.44,28.45 102.98,28.45 102.98,27.69 100.44,27.69
  pour Top (isolate 0.305, no thermals): 100.44,28.45 102.98,28.45 102.98,27.18 100.44,27.18
ANCHOR5  (via drill 0.3)
  other vias: 33.91,68.89 35.69,68.89
  pour Top (isolate 0.305, no thermals): 33.53,69.27 36.07,69.27 36.07,68 33.53,68
  pour Bottom (isolate 0.305, no thermals): 33.53,69.27 36.07,69.27 36.07,68.5 33.53,68.5
ANCHOR6  (via drill 0.3)
  other vias: 46.99,68.89 48.77,68.89
  pour Bottom (isolate 0.305, no thermals): 46.61,69.27 49.15,69.27 49.15,68.5 46.61,68.5
  pour Top (isolate 0.305, no thermals): 46.61,69.27 49.15,69.27 49.15,68 46.61,68
ANCHOR7  (via drill 0.3)
  other vias: 87.74,68.89 89.52,68.89
  pour Top (isolate 0.305, no thermals): 87.36,69.27 89.9,69.27 89.9,68 87.36,68
  pour Bottom (isolate 0.305, no thermals): 87.36,69.27 89.9,69.27 89.9,68.5 87.36,68.5
ANCHOR8  (via drill 0.3)
  other vias: 100.82,68.89 102.6,68.89
  pour Bottom (isolate 0.305, no thermals): 100.44,69.27 102.98,69.27 102.98,68.5 100.44,68.5
  pour Top (isolate 0.305, no thermals): 100.44,69.27 102.98,69.27 102.98,68 100.44,68
ANT
  Top 0.254: R11.2 R6.2
  Top 1.448: 13.56,22.75 U2.ANT 18.14,22.75 | R6.2 18.12,22.73 18.14,22.75 | 18.14,22.75 R7.1
ANT1
  Top 0.254: R23.2 R18.2
  Top 1.448: 67.39,22.75 U4.ANT 71.97,22.75 | R18.2 71.95,22.73 71.97,22.75 | 71.97,22.75 R19.1
ANT2
  Top 0.254: R35.2 R30.2
  Top 1.448: 13.56,63.57 U6.ANT 18.14,63.57 | R30.2 18.12,63.55 18.14,63.57 | 18.14,63.57 R31.1
ANT3
  Top 0.254: R47.2 R42.2
  Top 1.448: 67.39,63.57 U8.ANT 71.97,63.57 | R42.2 71.95,63.55 71.97,63.57 | 71.97,63.57 R43.1
GND  (via drill 0.3)
  Top 0.152: J4.6 39.88,22.51 U1.3
  other vias: 55.63,20.83 36.07,19.56 34.8,12.83 52.58,18.29 41.15,17.02 52.58,14.48 38.61,10.67 41.15,10.67 46.1,10.92
  pour Bottom (isolate 0.305): 6.86,27.18 60.2,27.18 60.2,6.86 6.86,6.86
  pour Top (isolate 0.305): 6.86,27.18 60.2,27.18 60.2,6.86 6.86,6.86
GND1  (via drill 0.3)
  Top 0.152: J9.6 93.71,22.51 U3.3
  other vias: 109.45,20.83 89.9,19.56 88.63,12.83 106.41,18.29 94.98,17.02 106.41,14.48 92.44,10.67 94.98,10.67 99.93,10.92
  pour Bottom (isolate 0.305): 60.69,27.18 114.03,27.18 114.03,6.86 60.69,6.86
  pour Top (isolate 0.305): 60.69,27.18 114.03,27.18 114.03,6.86 60.69,6.86
GND2  (via drill 0.3)
  Top 0.152: J15.6 39.88,63.33 U5.3
  other vias: 55.63,61.65 36.07,60.38 34.8,53.65 52.58,59.11 41.15,57.84 52.58,55.3 38.61,51.49 41.15,51.49 46.1,51.74
  pour Bottom (isolate 0.305): 6.86,68 60.2,68 60.2,47.68 6.86,47.68
  pour Top (isolate 0.305): 6.86,68 60.2,68 60.2,47.68 6.86,47.68
GND3  (via drill 0.3)
  Top 0.152: J21.6 93.71,63.33 U7.3
  other vias: 109.45,61.65 89.9,60.38 88.63,53.65 106.41,59.11 94.98,57.84 106.41,55.3 92.44,51.49 94.98,51.49 99.93,51.74
  pour Bottom (isolate 0.305): 60.69,68 114.03,68 114.03,47.68 60.69,47.68
  pour Top (isolate 0.305): 60.69,68 114.03,68 114.03,47.68 60.69,47.68
INT  (via drill 0.3)
  Top 0.152: U1.23 40.61,12.61 42.04,11.18 v43.69,11.18
  Bottom 0.152: v43.69,11.18 43.69,9.4 J6.1
INT1  (via drill 0.3)
  Top 0.152: U3.23 94.44,12.61 95.87,11.18 v97.52,11.18
  Bottom 0.152: v97.52,11.18 97.52,9.4 J12.1
INT2  (via drill 0.3)
  Top 0.152: U5.23 40.61,53.42 42.04,51.99 v43.69,51.99
  Bottom 0.152: v43.69,51.99 43.69,50.22 J18.1
INT3  (via drill 0.3)
  Top 0.152: U7.23 94.44,53.42 95.87,51.99 v97.52,51.99
  Bottom 0.152: v97.52,51.99 97.52,50.22 J24.1
MISO
  Top 0.152: J4.1 37.08,15.49 U1.16 34.29,15.46 34.29,14.86 33.66,14.22 33.66,11.18 33.23,10.75 U2.MISO
MISO1
  Top 0.152: J9.1 90.91,15.49 U3.16 88.12,15.46 88.12,14.86 87.48,14.22 87.48,11.18 87.06,10.75 U4.MISO
MISO2
  Top 0.152: J15.1 37.08,56.31 U5.16 34.29,56.28 34.29,55.68 33.66,55.04 33.66,51.99 33.23,51.57 U6.MISO
MISO3
  Top 0.152: J21.1 90.91,56.31 U7.16 88.12,56.28 88.12,55.68 87.48,55.04 87.48,51.99 87.06,51.57 U8.MISO
MOSI
  Top 0.152: J4.4 38.61,17.02 36.58,17.02 35.85,16.29 U1.15 34.28,16.26 33.53,16.26 33.27,16 33.27,12.95 33.07,12.75 U2.MOSI
MOSI1
  Top 0.152: J9.4 92.44,17.02 90.4,17.02 89.67,16.29 U3.15 88.11,16.26 87.36,16.26 87.1,16 87.1,12.95 86.9,12.75 U4.MOSI
MOSI2
  Top 0.152: J15.4 38.61,57.84 36.58,57.84 35.85,57.11 U5.15 34.28,57.07 33.53,57.07 33.27,56.82 33.27,53.77 33.07,53.57 U6.MOSI
MOSI3
  Top 0.152: J21.4 92.44,57.84 90.4,57.84 89.67,57.11 U7.15 88.11,57.07 87.36,57.07 87.1,56.82 87.1,53.77 86.9,53.57 U8.MOSI
N$1
  Top 0.152: R4.1 48.35,18.26
  Top 0.203: 48.35,18.26 48.35,19.53 D2.A
N$2
  Top 0.152: R5.1 48.35,15.72 D1.A
N$3  (via drill 0.3, 0.38)
  Top 0.152: U1.20 38.21,12.59 v38.61,12.19 | 46.61,22.06 C2.1 v45.47,22.1
  Bottom 0.152: v38.61,12.19 39.24,12.19 43.94,16.89 43.94,19.81 45.47,21.34 v45.47,22.1
N$4  (via drill 0.3)
  Top 0.203: U1.7 36.61,23.65 v36.7,23.75 | v39.62,26.29 38.66,26.29
  Bottom 0.203: v36.7,23.75 37.08,23.75 v39.62,26.29
N$5
  Top 0.152: U1.8
  Top 0.203: U1.8 35.81,23.37 35.69,23.49 33.66,23.49 33.53,23.62 33.53,24.13 33.66,24.26 36.27,24.26
N$6
  Top 0.203: R7.2 21.72,27.94 U$1.FEED
N$7  (via drill 0.3)
  Top 0.152: R3.2 52.16,21.25 v52.58,20.83
  Bottom 0.152: v52.58,20.83 54.1,20.83 57.66,17.27 JP1.1
N$8  (via drill 0.3)
  Top 0.152: R2.2 53.21,23.37 53.59,22.99 v53.59,19.56
  Bottom 0.152: v53.59,19.56 53.59,15.75 55.12,14.22 57.66,14.22 JP1.3
N$9
  Top 1.448: J5.FEED 10.54,21.42 R6.1
N$10  (via drill 0.3)
  Top 0.203: U3.7 90.44,23.65 v90.53,23.75 | v93.45,26.29 92.49,26.29
  Bottom 0.203: v90.53,23.75 90.91,23.75 v93.45,26.29
N$11
  Top 0.254: U$1.GND R10.2
N$12
  Top 0.152: U3.8
  Top 0.203: U3.8 89.64,23.37 89.51,23.49 87.48,23.49 87.36,23.62 87.36,24.13 87.48,24.26 90.09,24.26
N$13  (via drill 0.3)
  Top 0.152: R15.2 105.99,21.25 v106.41,20.83
  Bottom 0.152: v106.41,20.83 107.93,20.83 111.49,17.27 JP3.1
N$14  (via drill 0.3)
  Top 0.152: R14.2 107.04,23.37 107.42,22.99 v107.42,19.56
  Bottom 0.152: v107.42,19.56 107.42,15.75 108.95,14.22 111.49,14.22 JP3.3
N$15
  Top 0.152: R16.1 102.18,18.26
  Top 0.203: 102.18,18.26 102.18,19.53 D4.A
N$16
  Top 0.152: R17.1 102.18,15.72 D3.A
N$17
  Top 1.448: J10.FEED 64.37,21.42 R18.1
N$18  (via drill 0.3, 0.38)
  Top 0.152: U3.20 92.04,12.59 v92.44,12.19 | 100.44,22.06 C4.1 v99.29,22.1
  Bottom 0.152: v92.44,12.19 93.07,12.19 97.77,16.89 97.77,19.81 99.29,21.34 v99.29,22.1
N$19
  Top 0.203: R19.2 75.54,27.94 U$26.FEED
N$20
  Top 0.254: U$26.GND R22.2
N$21  (via drill 0.3)
  Top 0.203: U5.7 36.61,64.47 v36.7,64.57 | v39.62,67.11 38.66,67.11
  Bottom 0.203: v36.7,64.57 37.08,64.57 v39.62,67.11
N$22
  Top 0.152: 35.81,63.41 U5.8
  Top 0.203: 35.81,63.41 35.81,64.19 35.69,64.31 33.66,64.31 33.53,64.44 33.53,64.95 33.66,65.08 36.27,65.08
N$23  (via drill 0.3)
  Top 0.152: R27.2 52.16,62.07 v52.58,61.65
  Bottom 0.152: v52.58,61.65 54.1,61.65 57.66,58.09 JP5.1
N$24  (via drill 0.3)
  Top 0.152: R26.2 53.21,64.19 53.59,63.8 v53.59,60.38
  Bottom 0.152: v53.59,60.38 53.59,56.57 55.12,55.04 57.66,55.04 JP5.3
N$25
  Top 0.152: R28.1 48.35,59.08
  Top 0.203: 48.35,59.08 48.35,60.35 D6.A
N$26
  Top 0.152: R29.1 48.35,56.54 D5.A
N$27
  Top 1.448: J16.FEED 10.54,62.24 R30.1
N$28  (via drill 0.3, 0.38)
  Top 0.152: U5.20 38.21,53.41 v38.61,53.01 | 46.61,62.88 C7.1 v45.47,62.92
  Bottom 0.152: v38.61,53.01 39.24,53.01 43.94,57.71 43.94,60.63 45.47,62.15 v45.47,62.92
N$29
  Top 0.203: R31.2 21.72,68.76 U$55.FEED
N$30
  Top 0.254: U$55.GND R34.2
N$31  (via drill 0.3)
  Top 0.203: U7.7 90.44,64.47 v90.53,64.57 | v93.45,67.11 92.49,67.11
  Bottom 0.203: v90.53,64.57 90.91,64.57 v93.45,67.11
N$32
  Top 0.152: 89.64,63.41 U7.8
  Top 0.203: 89.64,63.41 89.64,64.19 89.51,64.31 87.48,64.31 87.36,64.44 87.36,64.95 87.48,65.08 90.09,65.08
N$33  (via drill 0.3)
  Top 0.152: R39.2 105.99,62.07 v106.41,61.65
  Bottom 0.152: v106.41,61.65 107.93,61.65 111.49,58.09 JP7.1
N$34  (via drill 0.3)
  Top 0.152: R38.2 107.04,64.19 107.42,63.8 v107.42,60.38
  Bottom 0.152: v107.42,60.38 107.42,56.57 108.95,55.04 111.49,55.04 JP7.3
N$35
  Top 0.152: R40.1 102.18,59.08
  Top 0.203: 102.18,59.08 102.18,60.35 D8.A
N$36
  Top 0.152: R41.1 102.18,56.54 D7.A
N$37
  Top 1.448: J22.FEED 64.37,62.24 R42.1
N$38  (via drill 0.3, 0.38)
  Top 0.152: U7.20 92.04,53.41 v92.44,53.01 | 100.44,62.88 C10.1 v99.29,62.92
  Bottom 0.152: v92.44,53.01 93.07,53.01 97.77,57.71 97.77,60.63 99.29,62.15 v99.29,62.92
N$39
  Top 0.203: R43.2 75.54,68.76 U$82.FEED
N$40
  Top 0.254: U$82.GND R46.2
PAIR_BTN
  Top 0.152: U1.24 41.43,13.97 44.2,13.97 47.5,10.67 47.5,9.3 S1.1
PAIR_BTN1
  Top 0.152: U3.24 95.26,13.97 98.02,13.97 101.33,10.67 101.33,9.3 S2.1
PAIR_BTN2
  Top 0.152: U5.24 41.43,54.79 44.2,54.79 47.5,51.49 47.5,50.11 S3.1
PAIR_BTN3
  Top 0.152: U7.24 95.26,54.79 98.02,54.79 101.33,51.49 101.33,50.11 S4.1
PAIR_LED
  Top 0.152: U1.25 44.33,15.49 45.34,14.48 R5.2
PAIR_LED1
  Top 0.152: U3.25 98.16,15.49 99.17,14.48 R17.2
PAIR_LED2
  Top 0.152: U5.25 44.33,56.31 45.34,55.3 R29.2
PAIR_LED3
  Top 0.152: U7.25 98.16,56.31 99.17,55.3 R41.2
PWR_LED
  Top 0.152: U1.26 45.37,16.29 46.61,17.53 46.61,18.25 R4.2
PWR_LED1
  Top 0.152: U3.26 99.2,16.29 100.44,17.53 100.44,18.25 R16.2
PWR_LED2
  Top 0.152: U5.26 45.37,57.11 46.61,58.34 46.61,59.07 R28.2
PWR_LED3
  Top 0.152: U7.26 99.2,57.11 100.44,58.34 100.44,59.07 R40.2
RFM_CS
  Top 0.152: U1.14 33.47,17.09 33.15,16.76 31.39,16.76 U2.NSS 31.36,16.76 29.08,16.76 28.07,17.78 12.95,17.78 12.23,17.06 R12.1
RFM_CS1
  Top 0.152: U3.14 87.3,17.09 86.97,16.76 85.22,16.76 U4.NSS 85.19,16.76 82.91,16.76 81.9,17.78 66.78,17.78 66.06,17.06 R24.1
RFM_CS2
  Top 0.152: U5.14 33.47,57.91 33.15,57.58 31.39,57.58 U6.NSS 31.36,57.58 29.08,57.58 28.07,58.6 12.95,58.6 12.23,57.88 R36.1
RFM_CS3
  Top 0.152: U7.14 87.3,57.91 86.97,57.58 85.22,57.58 U8.NSS 85.19,57.58 82.91,57.58 81.9,58.6 66.78,58.6 66.06,57.88 R48.1
RFM_DIO1  (via drill 0.38)
  Top 0.152: U2.DIO1 13.8,10.75 v13.59,10.54 | v28.07,21.34 28.45,21.72 32.89,21.72 33.15,21.46 33.15,20.57 33.4,20.32 34.28,20.32 U1.10
  Bottom 0.152: v13.59,10.54 17.27,10.54 v28.07,21.34
RFM_DIO2  (via drill 0.38)
  Top 0.152: U2.DIO2 14.11,8.75 v14.1,8.76 | v28.45,19.81 33.02,19.81 33.34,19.49 U1.11
  Bottom 0.152: v14.1,8.76 17.4,8.76 v28.45,19.81
RFM_DIO3  (via drill 0.38)
  Top 0.152: U4.DIO1 67.62,10.75 v67.42,10.54 | v81.9,21.34 82.28,21.72 86.72,21.72 86.97,21.46 86.97,20.57 87.23,20.32 88.11,20.32 U3.10
  Bottom 0.152: v67.42,10.54 71.1,10.54 v81.9,21.34
RFM_DIO4  (via drill 0.38)
  Top 0.152: U4.DIO2 67.94,8.75 v67.92,8.76 | v82.28,19.81 86.85,19.81 87.17,19.49 U3.11
  Bottom 0.152: v67.92,8.76 71.23,8.76 v82.28,19.81
RFM_DIO5  (via drill 0.38)
  Top 0.152: U6.DIO1 13.8,51.57 v13.59,51.36 | v28.07,62.15 28.45,62.53 32.89,62.53 33.15,62.28 33.15,61.39 33.4,61.14 34.28,61.14 U5.10
  Bottom 0.152: v13.59,51.36 17.27,51.36 v28.07,62.15
RFM_DIO6  (via drill 0.38)
  Top 0.152: U6.DIO2 14.11,49.57 v14.1,49.58 | v28.45,60.63 33.02,60.63 33.34,60.31 U5.11
  Bottom 0.152: v14.1,49.58 17.4,49.58 v28.45,60.63
RFM_DIO7  (via drill 0.38)
  Top 0.152: U8.DIO1 67.62,51.57 v67.42,51.36 | v81.9,62.15 82.28,62.53 86.72,62.53 86.97,62.28 86.97,61.39 87.23,61.14 88.11,61.14 U7.10
  Bottom 0.152: v67.42,51.36 71.1,51.36 v81.9,62.15
RFM_DIO8  (via drill 0.38)
  Top 0.152: U8.DIO2 67.94,49.57 v67.92,49.58 | v82.28,60.63 86.85,60.63 87.17,60.31 U7.11
  Bottom 0.152: v67.92,49.58 71.23,49.58 v82.28,60.63
RFM_INT  (via drill 0.3)
  Top 0.152: v18.8,13.72 17.83,12.75 U2.DIO0 | v43.05,22.48 41.51,22.48 U1.1
  Bottom 0.152: v18.8,13.72 27.56,22.48 v43.05,22.48
RFM_INT1  (via drill 0.3)
  Top 0.152: v72.62,13.72 71.66,12.75 U4.DIO0 | v96.88,22.48 95.34,22.48 U3.1
  Bottom 0.152: v72.62,13.72 81.39,22.48 v96.88,22.48
RFM_INT2  (via drill 0.3)
  Top 0.152: v18.8,54.53 17.83,53.57 U6.DIO0 | v43.05,63.3 41.51,63.3 U5.1
  Bottom 0.152: v18.8,54.53 27.56,63.3 v43.05,63.3
RFM_INT3  (via drill 0.3)
  Top 0.152: v72.62,54.53 71.66,53.57 U8.DIO0 | v96.88,63.3 95.34,63.3 U7.1
  Bottom 0.152: v72.62,54.53 81.39,63.3 v96.88,63.3
RFM_RST
  Top 0.152: U1.13 33.55,17.89 33.27,18.16 33.27,18.54 33.15,18.67 31.45,18.67 U2.!RESET
RFM_RST1
  Top 0.152: U3.13 87.38,17.89 87.1,18.16 87.1,18.54 86.97,18.67 85.28,18.67 U4.!RESET
RFM_RST2
  Top 0.152: U5.13 33.55,58.71 33.27,58.98 33.27,59.36 33.15,59.49 31.45,59.49 U6.!RESET
RFM_RST3
  Top 0.152: U7.13 87.38,58.71 87.1,58.98 87.1,59.36 86.97,59.49 85.28,59.49 U8.!RESET
RST
  Top 0.152: J4.5 38.61,19.56 40.64,19.56 41.51,18.69 U1.29 43.71,18.69 45.47,20.45 45.47,21.08 44.83,21.72 44.83,22.48 45.72,23.37 | 45.72,23.37 R1.1 | TP3.P$1 45.21,23.88 45.72,23.37
RST1
  Top 0.152: J9.5 92.44,19.56 94.47,19.56 95.34,18.69 U3.29 97.53,18.69 99.29,20.45 99.29,21.08 98.66,21.72 98.66,22.48 99.55,23.37 | 99.55,23.37 R13.1 | TP6.P$1 99.04,23.88 99.55,23.37
RST2
  Top 0.152: J15.5 38.61,60.38 40.64,60.38 41.51,59.51 U5.29 43.71,59.51 45.47,61.27 45.47,61.9 44.83,62.53 44.83,63.3 45.72,64.19 | 45.72,64.19 R25.1 | TP9.P$1 45.21,64.69 45.72,64.19
RST3
  Top 0.152: J21.5 92.44,60.38 94.47,60.38 95.34,59.51 U7.29 97.53,59.51 99.29,61.27 99.29,61.9 98.66,62.53 98.66,63.3 99.55,64.19 | 99.55,64.19 R37.1 | TP12.P$1 99.04,64.69 99.55,64.19
RX
  Top 0.152: U1.30 43.62,19.49 44.45,20.32 44.45,23.49 43.94,24 TP1.P$1
RX1
  Top 0.152: U3.30 97.45,19.49 98.28,20.32 98.28,23.49 97.77,24 TP4.P$1
RX2
  Top 0.152: U5.30 43.62,60.31 44.45,61.14 44.45,64.31 43.94,64.82 TP7.P$1
RX3
  Top 0.152: U7.30 97.45,60.31 98.28,61.14 98.28,64.31 97.77,64.82 TP10.P$1
SCK  (via drill 0.3)
  Top 0.152: v28.45,14.73 28.46,14.75 U2.SCK | v34.67,13.97 35.78,13.97 U1.17
  Bottom 0.152: v28.45,14.73 33.91,14.73 v34.67,13.97 36.07,15.37 36.07,17.78 36.58,18.29 J4.3
SCK1  (via drill 0.3)
  Top 0.152: v82.28,14.73 82.29,14.75 U4.SCK | v88.5,13.97 89.61,13.97 U3.17
  Bottom 0.152: v82.28,14.73 87.74,14.73 v88.5,13.97 89.9,15.37 89.9,17.78 90.4,18.29 J9.3
SCK2  (via drill 0.3)
  Top 0.152: v28.45,55.55 28.46,55.57 U6.SCK | v34.67,54.79 35.78,54.79 U5.17
  Bottom 0.152: v28.45,55.55 33.91,55.55 v34.67,54.79 36.07,56.18 36.07,58.6 36.58,59.11 J15.3
SCK3  (via drill 0.3)
  Top 0.152: v82.28,55.55 82.29,55.57 U8.SCK | v88.5,54.79 89.61,54.79 U7.17
  Bottom 0.152: v82.28,55.55 87.74,55.55 v88.5,54.79 89.9,56.18 89.9,58.6 90.4,59.11 J21.3
SCL  (via drill 0.3)
  Top 0.152: J1.4 52.35,17.25 51.31,18.29 v51.31,19.05 51.31,23.24 51.18,23.37 R2.1 50.55,23.46 50.55,24.64 50.78,24.87 J2.4 | U1.28 43.8,17.89 v44.96,19.05
  Bottom 0.152: v44.96,19.05 v51.31,19.05 51.31,17.53 50.8,17.02 46.23,17.02 42.42,13.21 J3.4
SCL1  (via drill 0.3)
  Top 0.152: J7.4 106.18,17.25 105.14,18.29 v105.14,19.05 105.14,23.24 105.01,23.37 R14.1 104.37,23.46 104.37,24.64 104.6,24.87 J8.4 | U3.28 97.62,17.89 v98.79,19.05
  Bottom 0.152: v98.79,19.05 v105.14,19.05 105.14,17.53 104.63,17.02 100.06,17.02 96.25,13.21 J11.4
SCL2  (via drill 0.3)
  Top 0.152: J13.4 52.35,58.07 51.31,59.11 v51.31,59.87 51.31,64.06 51.18,64.19 R26.1 50.55,64.27 50.55,65.46 50.78,65.69 J14.4 | U5.28 43.8,58.71 v44.96,59.87
  Bottom 0.152: v44.96,59.87 v51.31,59.87 51.31,58.34 50.8,57.84 46.23,57.84 42.42,54.03 J17.4
SCL3  (via drill 0.3)
  Top 0.152: J19.4 106.18,58.07 105.14,59.11 v105.14,59.87 105.14,64.06 105.01,64.19 R38.1 104.37,64.27 104.37,65.46 104.6,65.69 J20.4 | U7.28 97.62,58.71 v98.79,59.87
  Bottom 0.152: v98.79,59.87 v105.14,59.87 105.14,58.34 104.63,57.84 100.06,57.84 96.25,54.03 J23.4
SDA  (via drill 0.3)
  Top 0.152: 50.42,22.06 v50.42,18.29 52.46,16.25 J1.3 55.13,16.26 56.26,16.26 56.52,16.51 56.52,23.49 56.14,23.87 J2.3 | U1.27 44.14,17.09 v44.96,17.91
  Top 0.203: 50.42,22.06 R3.1
  Bottom 0.152: v50.42,18.29 50.04,17.91 v44.96,17.91 44.96,16.76 39.88,11.68 J3.3
SDA1  (via drill 0.3)
  Top 0.152: 104.25,22.06 v104.25,18.29 106.29,16.25 J7.3 108.95,16.26 110.09,16.26 110.34,16.51 110.34,23.49 109.97,23.87 J8.3 | U3.27 97.97,17.09 v98.79,17.91
  Top 0.203: 104.25,22.06 R15.1
  Bottom 0.152: v104.25,18.29 103.87,17.91 v98.79,17.91 98.79,16.76 93.71,11.68 J11.3
SDA2  (via drill 0.3)
  Top 0.152: 50.42,62.88 v50.42,59.11 52.46,57.07 J13.3 56.26,57.07 56.52,57.33 56.52,64.31 56.14,64.69 J14.3 | U5.27 44.14,57.91 v44.96,58.73
  Top 0.203: 50.42,62.88 R27.1
  Bottom 0.152: v50.42,59.11 50.04,58.73 v44.96,58.73 44.96,57.58 39.88,52.5 J17.3
SDA3  (via drill 0.3)
  Top 0.152: 104.25,62.88 v104.25,59.11 106.29,57.07 J19.3 110.09,57.07 110.34,57.33 110.34,64.31 109.97,64.69 J20.3 | U7.27 97.97,57.91 v98.79,58.73
  Top 0.203: 104.25,62.88 R39.1
  Bottom 0.152: v104.25,59.11 103.87,58.73 v98.79,58.73 98.79,57.58 93.71,52.5 J23.3
TX
  Top 0.152: U1.31 43.78,20.29 43.94,20.45 43.94,22.73 42.67,24 TP2.P$1
TX1
  Top 0.152: U3.31 97.61,20.29 97.77,20.45 97.77,22.73 96.5,24 TP5.P$1
TX2
  Top 0.152: U5.31 43.78,61.11 43.94,61.27 43.94,63.55 42.67,64.82 TP8.P$1
TX3
  Top 0.152: U7.31 97.61,61.11 97.77,61.27 97.77,63.55 96.5,64.82 TP11.P$1

## Text on the board
Bottom: X03 | X03 | X03 | X03
Milling: v-cut | v-cut | v-cut | v-cut | v-cut | v-cut | v-cut | v-cut
tDocu: RFM95W / 915MHz | RFM95W / 915MHz | RFM95W / 915MHz | RFM95W / 915MHz